# EAGLE board version_0_test_medidas_ok (EAGLE 8.3.1)

Size 122.07 x 36.83 mm. Coordinates in mm from the lower left corner, seen from the top.
Outline: 0,0 122.07,0 122.07,36.83 0,36.83 0,0
Copper layers (1*16): Top 0.035mm / dielectric 1.5mm / Bottom 0.035mm
Design rules "default": minimum track width 6mil, minimum drill 0.35mm, track to track 6mil, track to pad 6mil, pad to pad 6mil, via to via 6mil, smd to smd 6mil, copper to edge 40mil, drill to drill 6mil, minimum pad ring 10mil, minimum via ring 8mil, stop-mask expansion 4mil, vias tented up to drill 0mil, thermal gap 10mil

## Footprints (pad centres in the part's own frame; a part is rotated, then mirrored left to right if it is on the bottom)
SMD2,54-5,08 = smd 2.54 x 5.08: 1 0,0
DOORSENSOR = drill 0.9 pad 1.93 long: GND 0,6.35; L1 -5.08,6.35; L2 -2.54,6.35; R1 5.08,6.35; R2 2.54,6.35
DIL16 = drill 0.813 long: 1 -8.89,-3.81; 2 -6.35,-3.81; 3 -3.81,-3.81; 4 -1.27,-3.81; 5 1.27,-3.81; 6 3.81,-3.81; 7 6.35,-3.81; 8 8.89,-3.81; 9 8.89,3.81; 10 6.35,3.81; 11 3.81,3.81; 12 1.27,3.81; 13 -1.27,3.81; 14 -3.81,3.81; 15 -6.35,3.81; 16 -8.89,3.81

## Placement (x,y rotation side)
DOOR_BLACK_OUT  [SMD2,54-5,08]  41.91,17.78 90 top
DOOR_DIB_IN  [SMD2,54-5,08]  29.21,17.78 90 top
DOOR_DIRA_IN  [SMD2,54-5,08]  29.21,21.59 90 top
DOOR_PWM_1_IN  [SMD2,54-5,08]  41.91,27.94 90 top
DOOR_RED_OUT  [SMD2,54-5,08]  41.91,21.59 90 top
DOORSENSOR  DOORSENSOR  [DOORSENSOR]  100.58,23.37 0 top
IC1  L293E  [DIL16]  57.15,19.05 270 top
LED_BLACK_OUT  [SMD2,54-5,08]  72.39,17.78 90 top
LED_DIRA_IN  [SMD2,54-5,08]  83.82,21.59 90 top
LED_DIRB_IN  [SMD2,54-5,08]  83.82,17.78 90 top
LED_PWM_2_IN  [SMD2,54-5,08]  72.39,10.16 90 top
LED_RED_OUT  [SMD2,54-5,08]  72.39,21.59 90 top
PAD1  [SMD2,54-5,08]  41.91,10.16 90 top
PAD2  [SMD2,54-5,08]  72.39,27.94 90 top
S_CLOSED  [SMD2,54-5,08]  96.52,8.89 180 top
S_OPEN  [SMD2,54-5,08]  101.6,8.89 180 top

## Library data of the parts
DOOR_BLACK_OUT DOOR_DIB_IN DOOR_DIRA_IN DOOR_PWM_1_IN DOOR_RED_OUT LED_BLACK_OUT LED_DIRA_IN LED_DIRB_IN LED_PWM_2_IN LED_RED_OUT PAD1 PAD2 S_CLOSED S_OPEN = wirepad
DOORSENSOR = custom_components
IC1 = texas; MF: Arrow Electronics; MPN: L293E; OC_FARNELL: 1467711; OC_NEWARK: 89K0732

## Nets
N$1: DOORSENSOR.GND IC1.4 IC1.5 IC1.12 IC1.13
N$2: IC1.8 PAD1.1
N$3: DOORSENSOR.L1 S_CLOSED.1
N$4: DOORSENSOR.R1 S_OPEN.1
N$5: DOOR_BLACK_OUT.1 IC1.6
N$6: DOOR_RED_OUT.1 IC1.3
N$7: IC1.9 LED_PWM_2_IN.1
N$8: DOOR_PWM_1_IN.1 IC1.1
N$9: DOOR_DIRA_IN.1 IC1.2
N$10: DOOR_DIB_IN.1 IC1.7
N$11: IC1.10 LED_DIRB_IN.1
N$12: IC1.15 LED_DIRA_IN.1
N$13: IC1.11 LED_BLACK_OUT.1
N$14: IC1.14 LED_RED_OUT.1
N$15: IC1.16 PAD2.1

## Tracks (layer width: path | path; a pad name or v marks a point on that pad's centre or on a via)
N$1  (4 unrouted)
N$2  (1 unrouted)
N$3  (1 unrouted)
N$4  (1 unrouted)
N$5  (1 unrouted)
N$6  (1 unrouted)
N$7  (1 unrouted)
N$8  (1 unrouted)
N$9  (1 unrouted)
N$10  (1 unrouted)
N$11  (1 unrouted)
N$12  (1 unrouted)
N$13  (1 unrouted)
N$14  (1 unrouted)
N$15  (1 unrouted)